# Altium PCB PCB1.PcbDoc
Units mm, origin at the board's own origin, x right, y up, seen from the top; angles counter-clockwise.
Board outline 98.81 x 77.72 mm, 2 copper layers (Top Layer, Bottom Layer); 15 components, 85 nets, 316 pads, 6 vias.
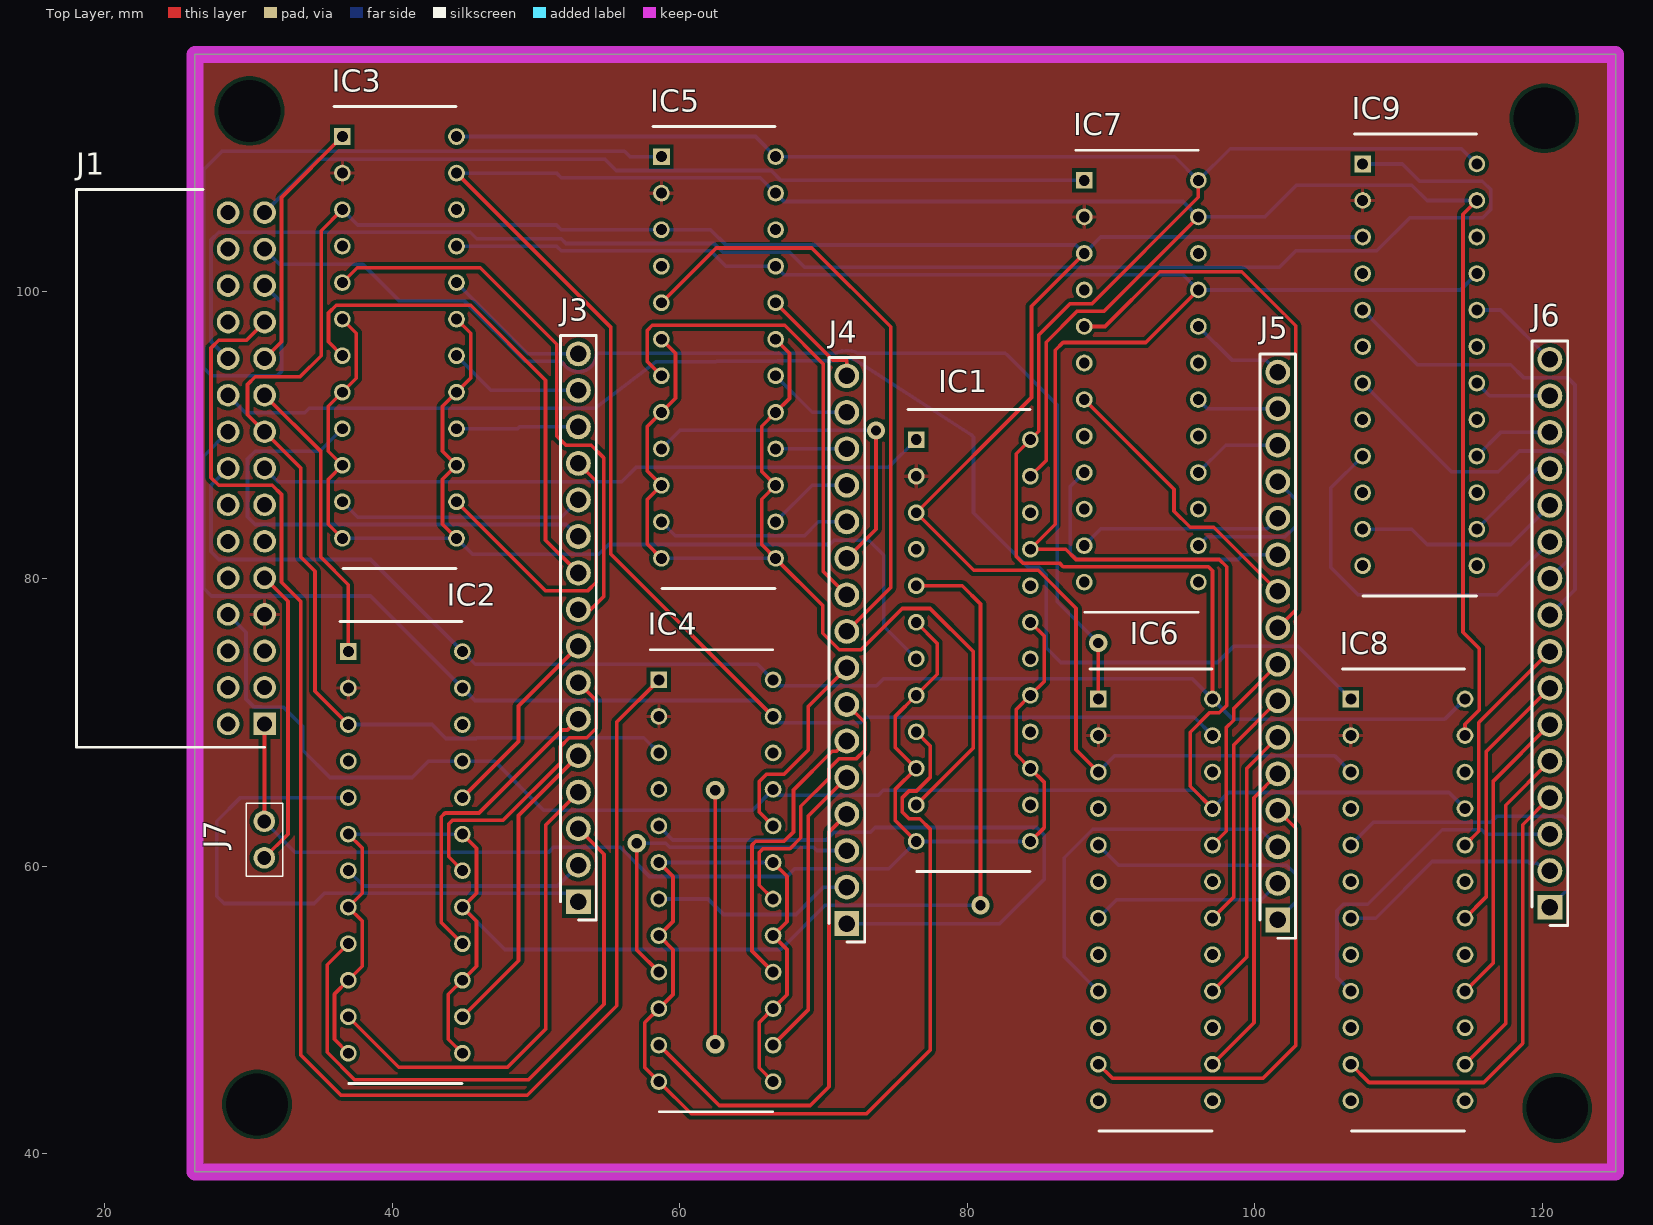
[diagram p0: Top Layer view]
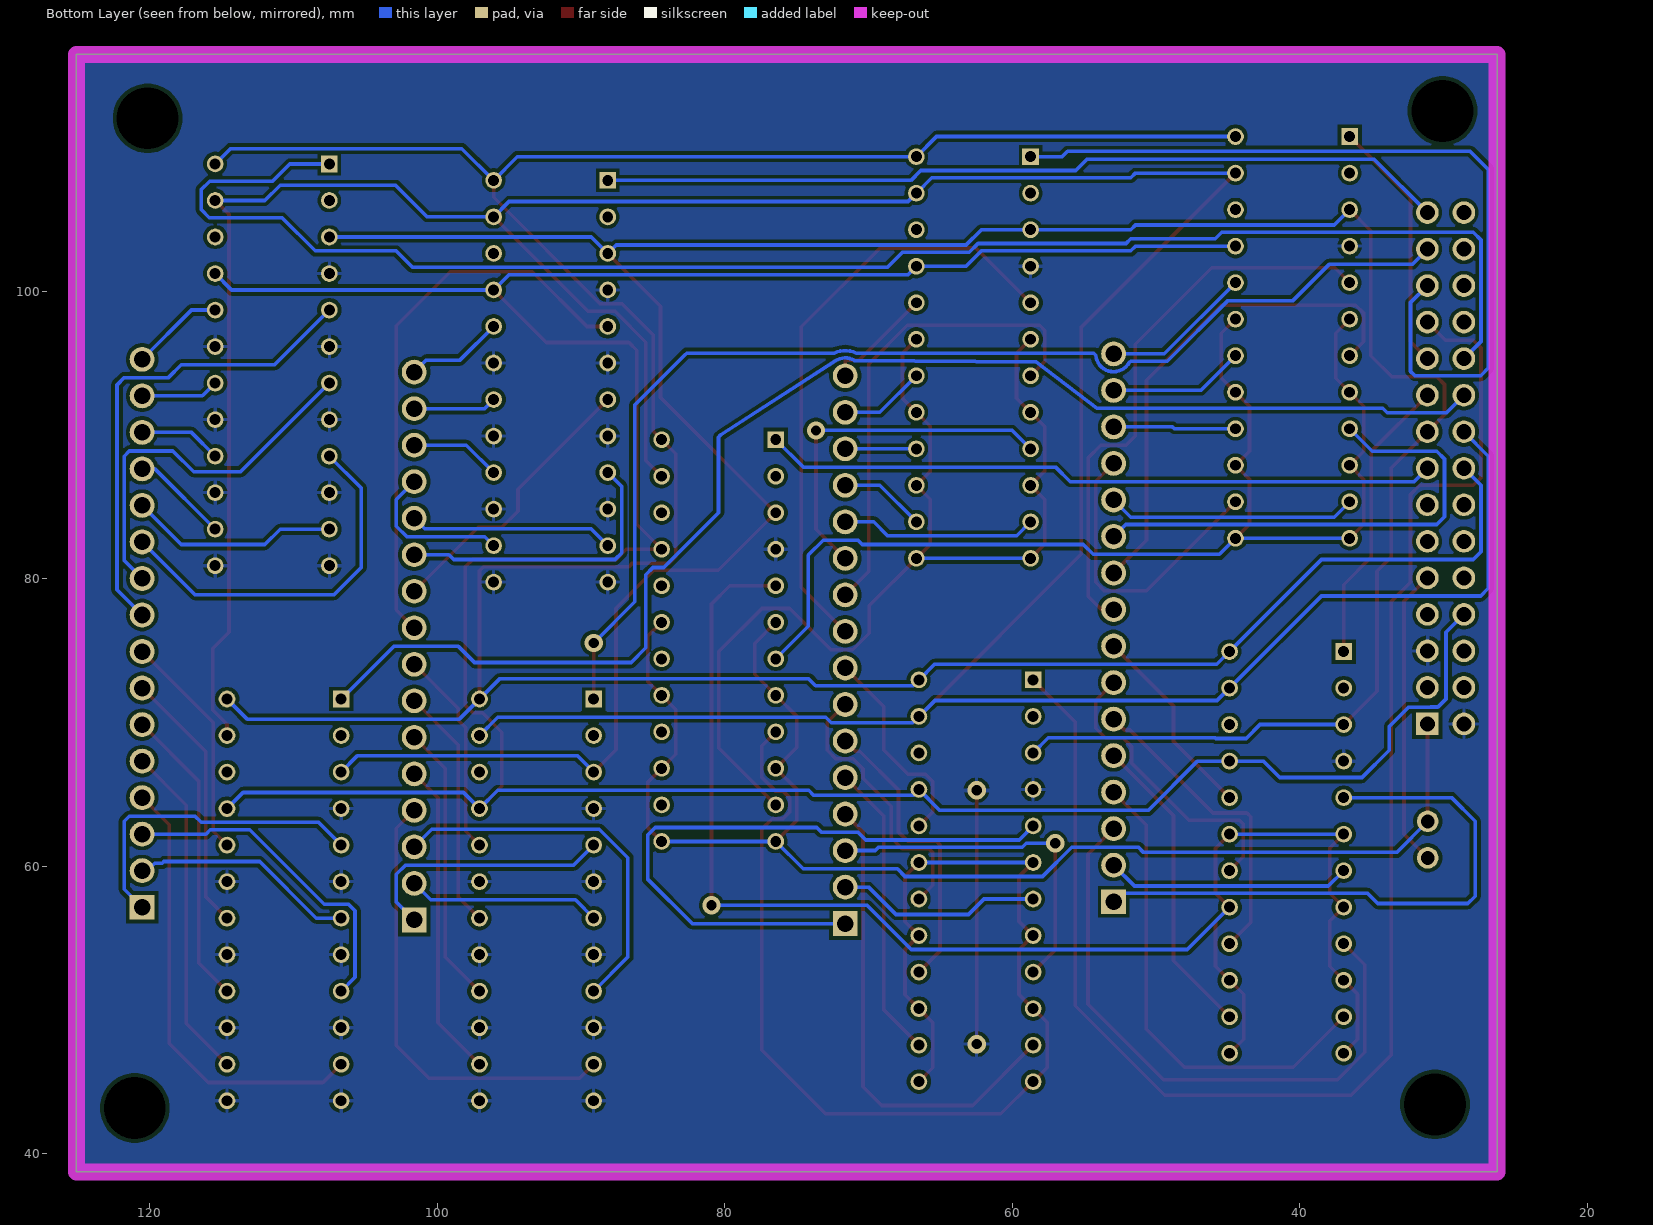
[diagram p1: Bottom Layer view, seen from below]
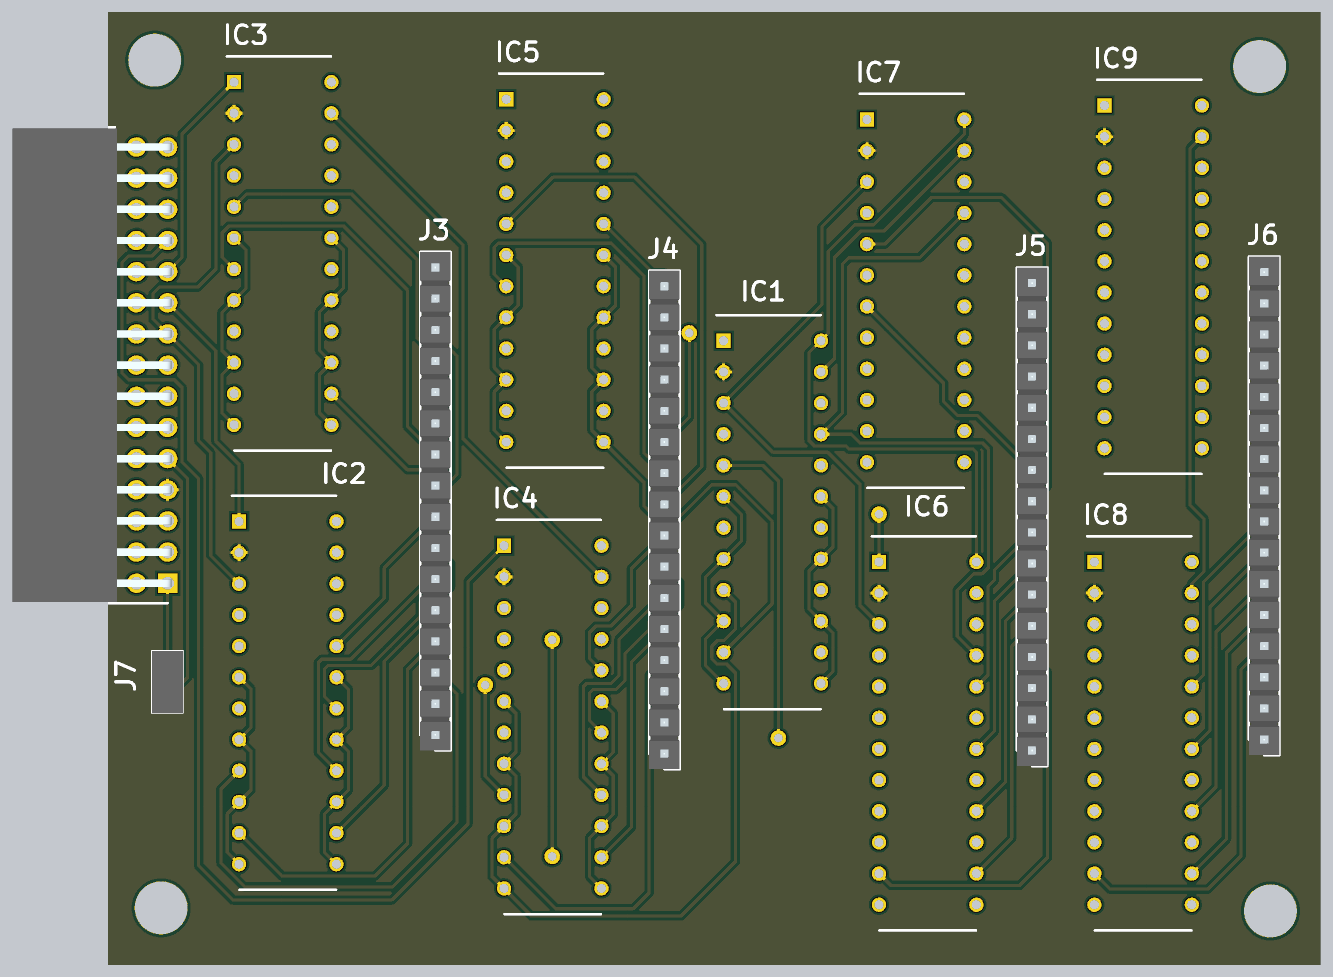
[diagram p2: 3D render of the assembled board from above, using the file's embedded part models]

## Layer stack, top to bottom
Top Solder: solder mask 0.0102, Solder Resist, Dk 3.5
Top Layer: signal copper 0.0356
Dielectric 1: dielectric 0.32, FR-4, Dk 4.8
Bottom Layer: signal copper 0.0356
Bottom Solder: solder mask 0.0102, Solder Resist, Dk 3.5

## Board outline
26.289,116.459 26.289,38.735 125.095,38.735 125.095,116.459

## Design rules (kind name [scope] priority, off if disabled: settings)
Clearance Clearance_1 [All] p1: gap=0.254 ignorepadtopadclearanceinfootprint=FALSE except(0: Arc-Hole Track-Hole SMDPad-Hole THPad-Hole Via-Hole Fill-Hole Poly-Hole Region-Hole Text-Hole)
Clearance [All] p2: gap=0.254 ignorepadtopadclearanceinfootprint=FALSE except(0: Arc-Hole Track-Hole SMDPad-Hole THPad-Hole Via-Hole Fill-Hole Poly-Hole Region-Hole Text-Hole)
PolygonConnect [All] p1: connectstyle=Relief reliefconductorwidth=0.254 reliefentries=4 polygonreliefangle="90 Angle" airgapwidth=0.254
RoutingVias [All] p1: holewidth=0.711 width=1.27 viastyle="Through Hole" minholewidth=0.711 minwidth=1.27 maxholewidth=0.711 maxwidth=1.27
SolderMaskExpansion [All] p1: expansion=0.102 istentingtop=FALSE
Width [All] p1: maxlimit=0.254 minlimit=0.254 preferedwidth=0.254
30 further rules are at their usual default settings.

## Components (designator, comment, footprint, x,y, rotation, side; value= is the part's Value field where it differs from the comment)
IC1 "MAX395CNG+" DIP794W56P254L3054H457Q24N 80.424,75.692 r0 top
IC2 "MAX395CNG+" DIP794W56P254L3054H457Q24N 40.927,60.96 r0 top
IC3 "MAX395CNG+" DIP794W56P254L3054H457Q24N 40.513,96.774 r0 top
IC4 "MAX395CNG+" DIP794W56P254L3054H457Q24N 62.527,58.987 r0 top
IC5 "MAX395CNG+" DIP794W56P254L3054H457Q24N 62.705,95.377 r0 top
IC6 "MAX395CNG+" DIP794W56P254L3054H457Q24N 93.091,57.658 r0 top
IC7 "MAX395CNG+" DIP794W56P254L3054H457Q24N 92.108,93.726 r0 top
IC8 "MAX395CNG+" DIP794W56P254L3054H457Q24N 110.65,57.658 r0 top
IC9 "MAX395CNG+" DIP794W56P254L3054H457Q24N 111.473,94.869 r0 top
J1 "PPPC152LJBN-RC" RHDRRA30W60P254X254_2X15_3860X850X528P 31.136,69.895 r90 top
J3 "0022284164" HDRV16W66P0X254_1X16_4064X249X1041P 52.959,57.531 r90 top
J4 "0022284164" HDRV16W66P0X254_1X16_4064X249X1041P 71.628,56.007 r90 top
J5 "0022284164" HDRV16W66P0X254_1X16_4064X249X1041P 101.6,56.261 r90 top
J6 "0022284164" HDRV16W66P0X254_1X16_4064X249X1041P 120.523,57.15 r90 top
J7 "315-47-102-41-003000" 3154710241003000 31.115,61.849 r270 top

## Footprints (in the part's own frame and the unit in brackets; to place one, negate y for a bottom-side part, rotate by r counter-clockwise, add the part's x,y. Pads: shape width x height; smd on the part's side, far side on the other; paste and mask are expansions set on the pad)
3154710241003000 [mm]
  round 1.496 hole 0.962: 1(-1.27,0) 2(1.27,0)
  silkscreen extent -2.54,-1.27 2.54,1.27, body extent -2.54,-1.27 2.54,1.27, height 3.2
DIP794W56P254L3054H457Q24N [mm]
  rect 1.16x1.16 hole 0.76: 1(-3.97,13.97)
  round 1.16 hole 0.76: 2(-3.97,11.43) 3(-3.97,8.89) 4(-3.97,6.35) 5(-3.97,3.81) 6(-3.97,1.27) 7(-3.97,-1.27) 8(-3.97,-3.81) 9(-3.97,-6.35) 10(-3.97,-8.89) 11(-3.97,-11.43) 12(-3.97,-13.97) 13(3.97,-13.97) 14(3.97,-11.43) 15(3.97,-8.89) 16(3.97,-6.35) 17(3.97,-3.81) 18(3.97,-1.27) 19(3.97,1.27) 20(3.97,3.81) 21(3.97,6.35) 22(3.97,8.89) 23(3.97,11.43) 24(3.97,13.97)
  silkscreen extent -4.55,-16.06 3.94,16.06, body extent 0,0 0,0
HDRV16W66P0X254_1X16_4064X249X1041P [mm]
  rect 1.725x1.725 hole 1.15: 1(0,0)
  round 1.725 hole 1.15: 2(2.54,0) 3(5.08,0) 4(7.62,0) 5(10.16,0) 6(12.7,0) 7(15.24,0) 8(17.78,0) 9(20.32,0) 10(22.86,0) 11(25.4,0) 12(27.94,0) 13(30.48,0) 14(33.02,0) 15(35.56,0) 16(38.1,0)
  silkscreen extent -1.27,-1.24 39.37,1.24, body extent -1.27,-1.24 39.37,1.24, height 10.41
RHDRRA30W60P254X254_2X15_3860X850X528P [mm]
  rect 1.575x1.575 hole 1.05: 1(0,0)
  round 1.575 hole 1.05: 2(0,2.54) 3(2.54,0) 4(2.54,2.54) 5(5.08,0) 6(5.08,2.54) 7(7.62,0) 8(7.62,2.54) 9(10.16,0) 10(10.16,2.54) 11(12.7,0) 12(12.7,2.54) 13(15.24,0) 14(15.24,2.54) 15(17.78,0) 16(17.78,2.54) 17(20.32,0) 18(20.32,2.54) 19(22.86,0) 20(22.86,2.54) 21(25.4,0) 22(25.4,2.54) 23(27.94,0) 24(27.94,2.54) 25(30.48,0) 26(30.48,2.54) 27(33.02,0) 28(33.02,2.54) 29(35.56,0) 30(35.56,2.54)
  silkscreen extent -1.62,0 37.18,13.09, body extent -1.52,-0.3 37.08,12.64, height 5.28

## Part data
IC1 IC2 IC3 IC4 IC5 IC6 IC7 IC8 IC9: "Integrated Circuit", Manufacturer_Name="Analog Devices", Mouser Part Number=700-MAX395CNG, Datasheet Link=https://datasheet.datasheetarchive.com/originals/distributors/SFDatasheet-4/sf-00086530.pdf, Height=4.572mm, Manufacturer_Part_Number=MAX395CNG+, Mouser Price/Stock=https://www.mouser.co.uk/ProductDetail/Maxim-Integrated/MAX395CNG%2b?qs=LHmEVA8xxfY2%2FNLn9d%2F0zg%3D%3D
J1: "Connector", Manufacturer_Name=Sullins, Datasheet Link=http://sullinscorp.com/drawings/101_P(N)PxCxx2LJBN-RC,_10494-H.pdf, Height=5.28mm, Manufacturer_Part_Number=PPPC152LJBN-RC
J3 J4 J5 J6: "Connector", Manufacturer_Name=Molex, Mouser Part Number=N/A, Arrow Part Number=0022284164, Arrow Price/Stock=https://www.arrow.com/en/products/0022284164/molex, Datasheet Link=https://g.componentsearchengine.com/Datasheets/1/0022284164.pdf, Height=10.41mm, Manufacturer_Part_Number=0022284164, Mouser Price/Stock=https://www.mouser.com/Search/Refine.aspx?Keyword=N%2FA
J7: "Connector", Manufacturer_Name=Mill-Max, Mouser Part Number=575-3154710241003000, Arrow Part Number=315-47-102-41-003000, Arrow Price/Stock=https://www.arrow.com/en/products/315-47-102-41-003000/mill-max, Datasheet Link=https://datasheet.datasheetarchive.com/originals/distributors/DKDS-31/604690.pdf, Height=3.0988mm, Manufacturer_Part_Number=315-47-102-41-003000, Mouser Price/Stock=https://www.mouser.com/Search/Refine.aspx?Keyword=575-3154710241003000

## Free pads (board coordinates)
  round 1.524 hole 4.3: 1(30.082,112.531) 1(30.607,43.434) 1(120.142,112.014) 1(121.031,43.18)

## Via types
v1: diameter 1.27, hole 0.711, Top Layer to Bottom Layer, 6 vias

## Nets (pads, with @x,y where several pads share a name; then routed paths per layer and width w, separated by ;. In a path a pad name is that pad's centre, name@x,y a point inside that pad or via, vN(x,y) a via of type N, cw(c..) or ccw(c..) an arc to the next point about the centre after c; other vN are vias at no path point)
GND: IC1.4 IC2.4 IC3.4 IC4.4 IC5.4 IC6.4 IC6.6 IC6.8 IC6.10 IC6.12 IC6.13 IC6.15 IC6.17 IC6.19 IC7.4 IC7.6 IC7.8 IC7.10 IC7.12 IC7.13 IC7.15 IC7.17 IC7.19 IC8.4 IC8.6 IC8.8 IC8.10 IC8.12 IC8.13 IC8.15 IC8.17 IC8.19 IC9.4 IC9.6 IC9.8 IC9.10 IC9.12 IC9.13 IC9.15 IC9.17 IC9.19 J1.2 J1.5 | length 17.7
  Top Layer w0.254: v1(62.484,47.625) v1(62.484,65.278)
NetIC1_1: IC1.1 J1.15 | length 46.9
  Bottom Layer w0.254: J1.15 32.07,86.741 55.982,86.741 56.998,87.757 74.549,87.757 IC1.1
NetIC1_3: IC1.3 IC2.3 IC3.3 IC4.3 IC5.3 IC6.3 IC7.3 IC8.3 IC9.3 J1.17 | length 205.7
  Top Layer w0.254: IC3.3 35.074,104.195 35.074,95.504 33.601,94.031 30.48,94.031 29.947,93.497 29.947,91.405 J1.17 33.655,87.696 33.655,81.509 34.646,80.518 34.646,72.161 IC2.3 ; IC7.3 84.473,98.951 84.473,92.601 IC1.3 80.463,80.573 84.933,80.573 87.566,77.94 87.566,68.103 IC6.3
  Bottom Layer w0.254: IC3.3 37.61,104.597 51.435,104.597 51.765,104.267 IC5.3 62.154,104.267 63.221,103.2 87.554,103.2 IC7.3 89.281,103.759 IC9.3 ; IC2.3 42.774,69.85 43.739,68.885 45.847,68.885 45.898,68.936 57.499,68.936 IC4.3 ; IC6.3 90.264,67.691 105.537,67.691 IC8.3
NetIC1_5: IC1.5 IC2.6 IC2.8 IC2.10 IC2.12 IC2.13 IC2.15 IC2.17 IC2.19 | length 107.7
  Top Layer w0.254: IC2.12 35.992,47.955 35.992,51.105 IC2.10 37.922,53.035 37.922,56.185 IC2.8 37.922,58.115 37.922,61.265 IC2.6 ; IC2.13 43.917,47.97 43.917,51.09 IC2.15 45.872,53.045 45.872,56.175 IC2.17 45.872,58.125 45.872,61.255 IC2.19 ; IC1.5 79.654,79.502 80.924,78.232 v1(80.924,57.277)
  Bottom Layer w0.254: IC2.6 IC2.19 ; IC2.17 47.843,54.204 67.031,54.204 70.104,57.277 v1(80.924,57.277)
NetIC1_6: IC1.6 IC1.8 IC1.10 IC1.12 IC1.13 IC1.15 IC1.17 IC1.19 J1.1 J7.1 | length 99.5
  Top Layer w0.254: J7.1 31.133,63.137 J1.1@31.133,69.892 ; IC1.12 74.985,63.191 74.985,65.333 IC1.10 74.985,68.271 74.985,70.413 IC1.8 77.923,73.351 77.923,75.493 IC1.6 ; IC1.13 85.369,62.697 85.369,65.827 IC1.15 83.414,67.782 83.414,70.902 IC1.17 85.369,72.857 85.369,75.987 IC1.19
  Bottom Layer w0.254: J7.1 33.274,60.96 50.876,60.96 51.232,61.316 55.866,61.316 57.898,59.284 67.462,59.284 67.996,59.817 74.549,59.817 IC1.12 IC1.13
NetIC1_7: IC1.7 IC3.6 IC3.8 IC3.10 IC3.12 IC3.13 IC3.15 IC3.17 IC3.19 | length 82.4
  Top Layer w0.254: IC3.12 35.56,83.787 35.56,86.901 IC3.10 35.56,88.867 35.56,91.981 IC3.8 37.516,93.937 37.516,97.071 IC3.6 ; IC3.13 43.51,83.777 43.51,86.911 IC3.15 43.51,88.857 43.51,91.991 IC3.17 45.466,93.947 45.466,97.061 IC3.19
  Bottom Layer w0.254: IC3.12 IC3.13 45.601,81.686 54.381,81.686 55.067,82.372 70.434,82.372 70.739,82.677 73.152,82.677 74.193,81.636 74.193,76.683 IC1.7
NetIC1_9: IC1.9 IC4.6 IC4.8 IC4.10 IC4.12 IC4.13 IC4.15 IC4.17 IC4.19 | length 89.8
  Top Layer w0.254: IC4.6 59.538,59.277 59.538,56.158 IC4.8 59.538,54.197 59.538,51.078 IC4.10 57.582,49.122 57.582,45.992 IC4.12 60.801,42.774 73,42.774 77.419,47.193 77.419,62.59 76.708,63.301 75.946,63.301 75.493,63.754 75.493,64.774 75.946,65.227 76.479,65.227 77.419,66.167 77.419,68.377 IC1.9 ; IC4.13 65.532,45.982 65.532,49.132 IC4.15 67.462,51.062 67.462,54.212 IC4.17 67.462,56.142 67.462,59.292 IC4.19
  Bottom Layer w0.254: IC4.6 IC4.19
NetIC1_11: IC1.11 IC5.6 IC5.8 IC5.10 IC5.12 IC5.13 IC5.15 IC5.17 IC5.19 | length 75.5
  Top Layer w0.254: IC5.12 57.76,82.382 57.76,85.512 IC5.10 57.76,87.462 57.76,90.592 IC5.8 59.715,92.547 59.715,95.667 IC5.6 ; IC5.19 67.64,95.682 67.64,92.532 IC5.17 65.71,90.602 65.71,87.452 IC5.15 65.71,85.522 65.71,82.372 IC5.13 69.952,78.13 69.952,76.2 71.095,75.057 72.619,75.057 75.489,77.927 77.419,77.927 80.416,74.93 80.416,68.224 IC1.11
  Bottom Layer w0.254: IC5.12 IC5.13
NetIC1_21: IC1.21 IC2.21 IC3.21 IC4.21 IC5.21 IC6.21 IC7.21 IC8.21 IC9.21 J1.8 | length 230.7
  Top Layer w0.254: IC7.21 92.426,96.424 86.669,96.424 86.131,95.887 86.131,83.779 IC1.21 86.854,82.042 87.561,81.335 97.536,81.335 98.044,80.827 98.044,71.175 97.536,70.667 96.847,70.667 95.504,69.324 95.504,65.565 IC6.21
  Bottom Layer w0.254: J1.8 29.845,76.266 29.845,71.628 30.404,71.069 30.912,71.069 30.917,71.064 32.441,71.064 33.782,69.723 33.782,68.072 35.687,66.167 41.402,66.167 42.545,67.31 47.117,67.31 50.546,63.881 65.041,63.881 IC4.21 66.912,64.922 73.812,64.922 74.168,65.278 95.791,65.278 IC6.21 98.179,65.126 113.502,65.126 IC8.21 ; IC3.21 51.435,103.124 51.765,102.794 62.154,102.794 63.221,101.727 IC5.21 67.259,101.143 95.011,101.143 IC7.21 114.3,100.076 IC9.21
NetIC1_23: IC1.23 IC2.23 IC3.23 IC4.23 IC5.23 IC6.23 IC7.23 IC8.23 IC9.23 J1.18 | length 269.3
  Top Layer w0.254: IC3.23 55.22,97.467 55.22,81.695 IC4.23 ; IC1.23 85.489,88.217 85.489,96.437 87.66,98.607 89.529,98.607 IC7.23 ; IC8.23 114.62,69.865 115.621,70.866 115.621,75.133 114.478,76.276 114.478,105.334 IC9.23
  Bottom Layer w0.254: J1.18 26.899,88.518 26.899,79.324 27.432,78.791 38.496,78.791 IC2.23 45.761,71.526 65.388,71.526 IC4.23 66.937,69.977 72.593,69.977 72.974,70.358 95.791,70.358 IC6.23 ; IC3.23 51.435,108.204 51.765,107.874 65.608,107.874 IC5.23 67.259,106.223 95.011,106.223 IC7.23 100.686,105.156 102.895,107.366 110.922,107.366 111.989,106.299 IC9.23
NetIC1_24: IC1.24 IC2.24 IC3.24 IC4.24 IC5.24 IC6.24 IC7.24 IC8.24 IC9.24 J1.16 | length 228.2
  Top Layer w0.254: IC7.24 96.078,106.517 88.676,99.115 87.152,99.115 84.981,96.945 84.981,90.249 IC1.24 83.414,88.682 83.414,81.534 83.867,81.081 86.415,81.081 86.669,80.827 96.774,80.827 97.061,80.54 IC6.24
  Bottom Layer w0.254: J1.16 27.407,86.486 27.407,81.864 27.94,81.331 38.496,81.331 IC2.24 45.786,74.041 65.413,74.041 IC4.24 66.912,72.542 73.685,72.542 74.168,73.025 95.664,73.025 IC6.24 98.458,70.231 113.223,70.231 IC8.24 ; IC3.24 65.278,110.744 IC5.24 94.427,109.347 IC7.24 98.288,109.906 114.376,109.906 IC9.24
NetIC2_1: IC2.1 J1.19 | length 20.2
  Top Layer w0.254: J1.19 35.052,88.839 35.052,81.483 36.957,79.578 IC2.1
NetIC2_5: IC2.5 J3.1 | length 40.9
  Bottom Layer w0.254: IC2.5 29.464,64.77 27.813,63.119 27.813,57.912 28.321,57.404 34.595,57.404 35.306,58.115 52.375,58.115 J3.1
NetIC2_7: IC2.7 J3.2 | length 17
  Bottom Layer w0.254: IC2.7 38.024,58.623 51.511,58.623 J3.2
NetIC2_9: IC2.9 J3.3 | length 43.3
  Top Layer w0.254: IC2.9 35.484,53.137 35.484,47.066 37.414,45.136 49.479,45.136 54.737,50.394 54.737,60.833 J3.3
NetIC2_11: IC2.11 J3.4 | length 33.7
  Top Layer w0.254: IC2.11 40.462,46.025 48.031,46.025 50.698,48.692 50.698,62.89 J3.4
NetIC2_14: IC2.14 J3.5 | length 21.5
  Top Layer w0.254: IC2.14 48.793,53.426 48.793,63.525 J3.5
NetIC2_16: IC2.16 J3.6 | length 21.8
  Top Layer w0.254: IC2.16 43.428,56.079 43.428,63.439 43.688,63.699 46.047,63.699 51.816,69.468 52.196,69.468 J3.6
NetIC2_18: IC2.18 J3.7 | length 21
  Top Layer w0.254: IC2.18 43.936,60.651 43.936,62.931 44.196,63.191 47.722,63.191 51.714,67.183 51.714,68.326 52.324,68.936 53.543,68.936 54.204,69.596 54.204,71.526 J3.7
NetIC2_20: IC2.20 J3.8 | length 13.9
  Top Layer w0.254: IC2.20 48.793,68.666 48.793,71.145 J3.8
NetIC3_1: IC3.1 J1.21 | length 17.7
  Top Layer w0.254: J1.21 32.309,96.468 32.309,106.51 IC3.1
NetIC3_5: IC3.5 J3.9 | length 39.6
  Top Layer w0.254: IC3.5 37.584,101.625 46.126,101.625 51.46,96.291 51.46,89.916 52.095,89.281 53.848,89.281 54.712,88.417 54.712,78.74 53.823,77.851 J3.9
NetIC3_7: IC3.7 J3.10 | length 35.2
  Top Layer w0.254: IC3.7 35.582,96.465 35.582,98.472 36.119,99.009 45.466,99.009 50.673,93.802 50.673,82.677 J3.10
NetIC3_9: IC3.9 J3.11 | length 35.1
  Bottom Layer w0.254: IC3.9 34.968,88.849 30.48,88.849 29.947,88.316 29.947,84.303 30.48,83.769 52.121,83.769 J3.11
NetIC3_11: IC3.11 J3.12 | length 17.4
  Bottom Layer w0.254: IC3.11 37.61,84.277 51.765,84.277 J3.12
NetIC3_14: IC3.14 J3.13 | length 21.3
  Top Layer w0.254: IC3.14 50.681,79.146 53.594,79.146 54.204,79.756 54.204,86.766 J3.13
NetIC3_16: IC3.16 J3.14 | length 8.5
  Bottom Layer w0.254: IC3.16 48.743,90.424 48.87,90.551 J3.14
NetIC3_18: IC3.18 J3.15 | length 9.5
  Bottom Layer w0.254: IC3.18 46.896,93.091 J3.15
NetIC3_20: IC3.20 J3.16 | length 10.5
  Bottom Layer w0.254: IC3.20 49.436,95.631 J3.16
NetIC4_1: IC4.1 J1.23 | length 108
  Top Layer w0.254: J1.23 29.871,96.571 27.94,96.571 27.407,96.037 27.407,87.02 27.94,86.487 31.674,86.487 32.309,85.852 32.309,79.756 33.655,78.41 33.655,46.863 36.449,44.069 49.403,44.069 55.626,50.292 55.626,70.026 IC4.1
NetIC4_5: IC4.5 J4.1 | length 45.9
  Bottom Layer w0.254: IC4.5 59.531,61.824 70.206,61.824 70.739,62.357 73.279,62.357 73.609,62.687 84.836,62.687 85.369,62.154 85.369,59.106 82.271,56.007 J4.1
NetIC4_7: IC4.7 J4.2 | length 14.3
  Bottom Layer w0.254: IC4.7 61.976,57.717 63.051,56.642 68.097,56.642 70.002,58.547 J4.2
NetIC4_9: IC4.9 J4.3 | length 24.4
  Top Layer w0.254: v1(57.023,61.595) 57.023,54.171 IC4.9
  Bottom Layer w0.254: v1(57.023,61.595) 59.041,61.595 59.32,61.316 69.317,61.316 69.545,61.087 J4.3
NetIC4_11: IC4.11 J4.4 | length 33.6
  Top Layer w0.254: IC4.11 62.756,43.358 69.088,43.358 70.383,44.653 70.383,62.382 J4.4
NetIC4_14: IC4.14 J4.5 | length 20.7
  Top Layer w0.254: IC4.14 68.936,49.996 68.936,63.475 J4.5
NetIC4_16: IC4.16 J4.6 | length 20.7
  Top Layer w0.254: IC4.16 65.028,54.106 65.028,61.468 65.286,61.726 67.263,61.726 67.92,62.382 67.92,65.3 70.612,67.992 70.913,67.992 J4.6
NetIC4_18: IC4.18 J4.7 | length 19.3
  Top Layer w0.254: IC4.18 65.536,58.678 65.536,60.96 65.794,61.218 67.67,61.218 68.428,61.976 68.428,64.16 70.383,66.116 70.383,66.777 71.069,67.462 72.263,67.462 72.873,68.072 72.873,70.002 J4.7
NetIC4_20: IC4.20 J4.8 | length 14.6
  Top Layer w0.254: IC4.20 65.532,63.762 65.532,65.888 66.04,66.396 67.259,66.396 68.936,68.072 68.936,71.095 J4.8
NetIC5_1: IC5.1 J1.25 | length 58.5
  Bottom Layer w0.254: J1.25 32.309,99.203 32.309,94.412 32.004,94.107 27.432,94.107 26.899,94.64 26.899,108.458 28.169,109.728 56.159,109.728 56.54,109.347 IC5.1
NetIC5_5: IC5.5 J4.9 | length 42.2
  Top Layer w0.254: IC5.5 62.545,102.997 69.19,102.997 74.676,97.511 74.676,79.375 J4.9
NetIC5_7: IC5.7 J4.10 | length 33.8
  Top Layer w0.254: IC5.7 57.76,95.082 57.76,97.282 58.09,97.612 67.31,97.612 69.977,94.945 69.977,80.518 J4.10
NetIC5_9: IC5.9 J4.11 | length 25.2
  Top Layer w0.254: J4.11 73.66,83.439 v1(73.66,90.297)
  Bottom Layer w0.254: IC5.9 60.03,90.322 73.635,90.322 v1(73.66,90.297)
NetIC5_11: IC5.11 J4.12 | length 13.7
  Bottom Layer w0.254: IC5.11 59.7,82.982 68.682,82.982 69.647,83.947 J4.12
NetIC5_14: IC5.14 J4.13 | length 6
  Bottom Layer w0.254: IC5.14 69.215,86.487 J4.13
NetIC5_16: IC5.16 J4.14 | length 5
  Bottom Layer w0.254: IC5.16 J4.14
NetIC5_18: IC5.18 J4.15 | length 6
  Bottom Layer w0.254: IC5.18 69.215,91.567 J4.15
NetIC5_20: IC5.20 J4.16 | length 7.7
  Top Layer w0.254: IC5.20 70.67,95.192 71.628,95.192 J4.16
NetIC6_1: IC6.1 J1.27 | length 82.5
  Top Layer w0.254: IC6.1 v1(89.121,75.522)
  Bottom Layer w0.254: J1.27 32.197,101.854 37.973,101.854 40.513,99.314 45.035,99.314 49.226,95.123 51.775,95.123 51.849,95.049 ; 51.849,95.049 51.873,95.025 ccw(c52.959,95.631) 54.199,95.543 54.263,95.606 54.337,95.68 70.859,95.68 cw(c71.628,94.107) 72.397,95.681 82.653,95.68 82.727,95.606 86.258,92.075 86.258,78.384 v1(89.121,75.522)
NetIC6_5: IC6.5 J5.1 | length 18.3
  Bottom Layer w0.254: IC6.5 90.518,60.071 102.21,60.071 102.845,59.436 102.845,57.506 J5.1
NetIC6_7: IC6.7 J5.2 | length 13.5
  Bottom Layer w0.254: IC6.7 90.391,57.658 100.457,57.658 J5.2
NetIC6_9: IC6.9 J5.3 | length 26.4
  Bottom Layer w0.254: IC6.9 86.741,53.688 86.741,60.579 88.722,62.56 100.381,62.56 J5.3
NetIC6_11: IC6.11 J5.4 | length 31.9
  Top Layer w0.254: IC6.11 90.086,45.263 100.584,45.263 102.845,47.523 102.845,62.636 J5.4
NetIC6_14: IC6.14 J5.5 | length 22.1
  Top Layer w0.254: IC6.14 99.944,49.111 99.944,64.765 J5.5
NetIC6_16: IC6.16 J5.6 | length 19.5
  Top Layer w0.254: IC6.16 99.436,53.683 99.436,66.797 J5.6
NetIC6_18: IC6.18 J5.7 | length 17
  Top Layer w0.254: IC6.18 98.53,57.857 98.53,68.431 J5.7
NetIC6_20: IC6.20 J5.8 | length 14.5
  Top Layer w0.254: IC6.20 98.022,62.429 98.022,69.651 98.53,70.159 98.53,70.971 J5.8
NetIC7_1: IC7.1 J1.29 | length 59.2
  Bottom Layer w0.254: J1.29 34.85,109.169 54.813,109.169 55.601,108.382 66.37,108.382 67.056,107.696 IC7.1
NetIC7_5: IC7.5 J5.9 | length 39.4
  Top Layer w0.254: IC7.5 89.586,97.536 93.396,101.346 99.085,101.346 102.845,97.587 102.845,77.826 J5.9
NetIC7_7: IC7.7 J5.10 | length 19.9
  Top Layer w0.254: IC7.7 94.386,86.208 94.386,84.684 95.504,83.566 97.155,83.566 J5.10
NetIC7_9: IC7.9 J5.11 | length 20.7
  Bottom Layer w0.254: IC7.9 87.173,86.411 87.173,81.788 87.63,81.331 98.857,81.331 99.187,81.661 J5.11
NetIC7_11: IC7.11 J5.12 | length 14.3
  Bottom Layer w0.254: IC7.11 89.306,83.464 100.863,83.464 J5.12
NetIC7_14: IC7.14 J5.13 | length 10.9
  Bottom Layer w0.254: IC7.14 96.688,82.906 102.108,82.906 102.845,83.642 102.845,85.496 J5.13
NetIC7_16: IC7.16 J5.14 | length 6.3
  Bottom Layer w0.254: IC7.16 97.983,89.281 J5.14
NetIC7_18: IC7.18 J5.15 | length 5.8
  Bottom Layer w0.254: IC7.18 96.713,91.821 J5.15
NetIC7_20: IC7.20 J5.16 | length 6.8
  Bottom Layer w0.254: IC7.20 98.415,95.199 100.762,95.199 J5.16
NetIC8_1: IC8.1 J1.20 | length 96
  Bottom Layer w0.254: J1.20 29.81,91.542 33.934,91.542 34.239,91.846 54.098,91.846 58.337,95.068 70.987,95.172 cw(c71.628,94.107) 72.305,95.15 80.293,89.989 80.442,89.84 80.442,84.582 84.252,80.772 84.988,80.772 85.496,80.264 85.496,75.184 86.512,74.168 97.409,74.168 98.527,75.286 103.022,75.286 IC8.1
NetIC8_5: IC8.5 J6.1 | length 22.6
  Bottom Layer w0.254: IC8.5 108.259,63.047 116.412,63.047 116.84,63.475 121.412,63.475 121.768,63.119 121.768,58.395 J6.1
NetIC8_7: IC8.7 J6.2 | length 15.7
  Bottom Layer w0.254: IC8.7 108.407,56.388 112.344,60.325 118.999,60.325 119.126,60.198 119.639,60.198 120.147,59.69 J6.2
NetIC8_9: IC8.9 J6.3 | length 23.3
  Bottom Layer w0.254: IC8.9 105.715,52.273 105.715,56.896 106.172,57.353 107.848,57.353 113.034,62.539 115.78,62.539 116.089,62.23 J6.3
NetIC8_11: IC8.11 J6.4 | length 31.5
  Top Layer w0.254: IC8.11 107.95,44.958 115.926,44.958 118.643,47.676 118.643,62.89 J6.4
NetIC8_14: IC8.14 J6.5 | length 23.5
  Top Layer w0.254: IC8.14 117.45,49.058 117.45,64.237 J6.5
NetIC8_16: IC8.16 J6.6 | length 21
  Top Layer w0.254: IC8.16 116.597,53.285 116.597,65.924 J6.6
NetIC8_18: IC8.18 J6.7 | length 18.4
  Top Layer w0.254: IC8.18 116.089,57.857 116.089,67.956 J6.7
NetIC8_20: IC8.20 J6.8 | length 15.9
  Top Layer w0.254: IC8.20 115.581,62.429 115.581,69.988 J6.8
NetIC9_1: IC9.1 J1.22 | length 111.7
  Bottom Layer w0.254: J1.22 27.407,96.485 27.407,103.556 27.94,104.089 45.441,104.089 45.898,103.632 51.765,103.632 52.095,103.302 62.382,103.302 62.992,102.692 67.64,102.692 68.682,101.651 101.727,101.651 102.87,102.794 108.483,102.794 110.795,105.105 115.849,105.105 116.408,105.664 116.408,107.061 115.824,107.645 111.455,107.645 110.261,108.839 IC9.1
NetIC9_5: IC9.5 J6.9 | length 33.7
  Bottom Layer w0.254: IC9.5 111.313,94.869 117.805,94.869 118.694,93.98 121.768,93.98 122.276,93.472 122.276,79.223 J6.9
NetIC9_7: IC9.7 J6.10 | length 26.6
  Bottom Layer w0.254: IC9.7 113.675,87.427 116.942,87.427 118.389,88.875 121.412,88.875 121.768,88.519 121.768,81.255 J6.10
NetIC9_9: IC9.9 J6.11 | length 26.2
  Bottom Layer w0.254: IC9.9 105.283,86.299 105.283,80.772 107.179,78.876 116.849,78.876 J6.11
NetIC9_11: IC9.11 J6.12 | length 14.6
  Bottom Layer w0.254: IC9.11 110.922,83.439 111.989,82.372 117.805,82.372 J6.12
NetIC9_14: IC9.14 J6.13 | length 6.8
  Bottom Layer w0.254: IC9.14 119.634,87.63 J6.13
NetIC9_16: IC9.16 J6.14 | length 5.8
  Bottom Layer w0.254: IC9.16 117.094,90.17 J6.14
NetIC9_18: IC9.18 J6.15 | length 5.4
  Bottom Layer w0.254: IC9.18 116.332,92.71 J6.15
NetIC9_20: IC9.20 J6.16 | length 6.5
  Bottom Layer w0.254: IC9.20 117.094,98.679 J6.16
NetJ1_9: J1.9 J7.2 | length 20.8
  Top Layer w0.254: J7.2 32.766,62.23 32.766,78.425 J1.9
VCC: IC1.2 IC2.2 IC3.2 IC4.2 IC5.2 IC6.2 IC7.2 IC8.2 IC9.2 J1.7
pads on no net: IC1.14 IC1.16 IC1.18 IC1.20 IC1.22 IC2.22 IC3.22 IC4.22 IC5.22 IC6.22 IC7.22 IC8.22 IC9.22 J1.3 J1.4 J1.6 J1.10 J1.11 J1.12 J1.13 J1.14 J1.24 J1.26 J1.28 J1.30

## Polygon pours and split planes (outlines as drawn)
VCC on Top Layer "VCC_L01_P001" (solid, pour order 1): 26.289,116.459 125.095,116.459 125.095,38.735 26.289,38.735
GND on Bottom Layer "GND_L02_P002" (solid, pour order 2): 26.289,116.459 125.095,116.459 125.095,38.735 26.289,38.735

## Keep-outs
Keep-Out Layer:
  the board outline again, w1.2